# EAGLE board PCB (EAGLE 9.7.0)
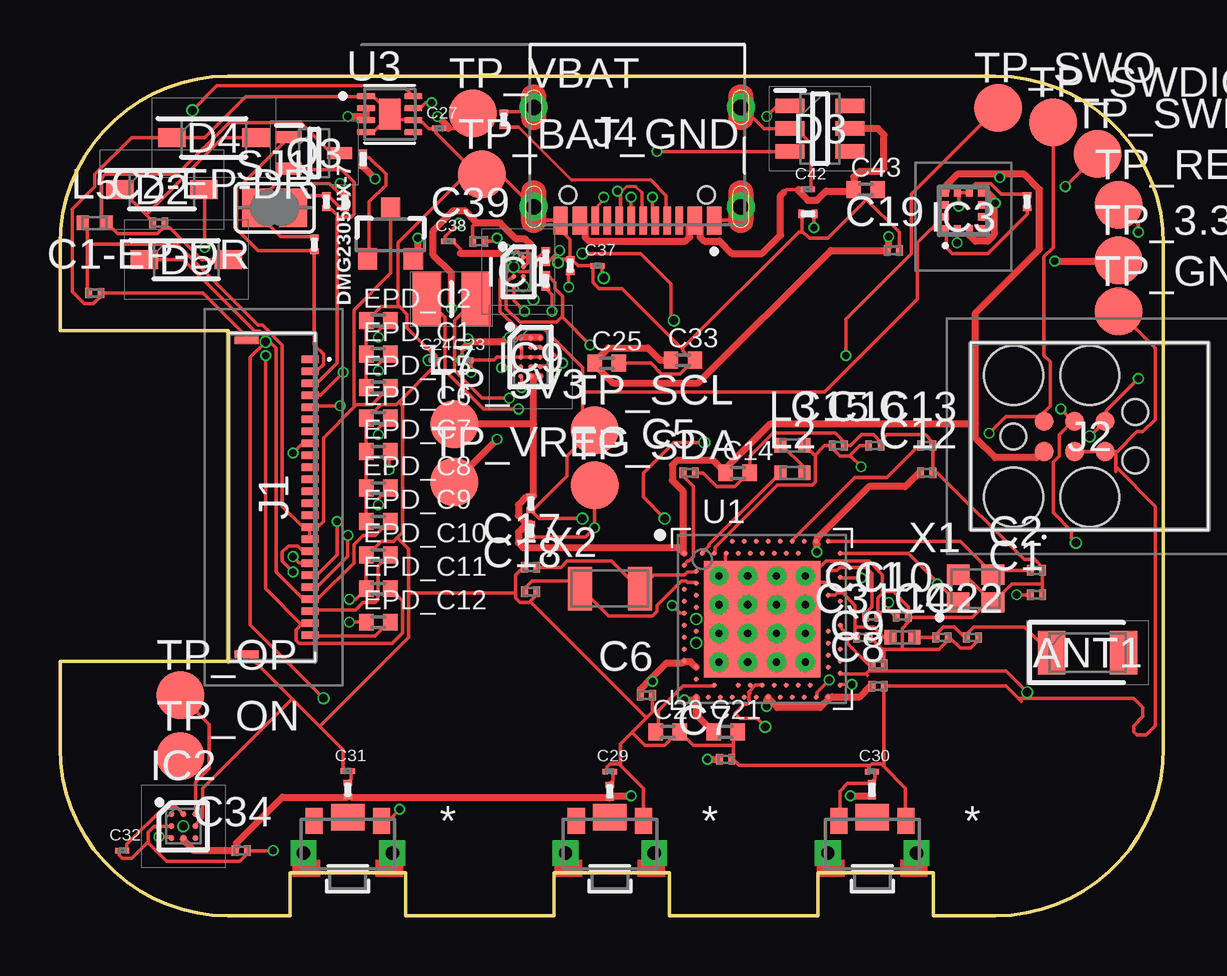
[diagram p0: board, top side]
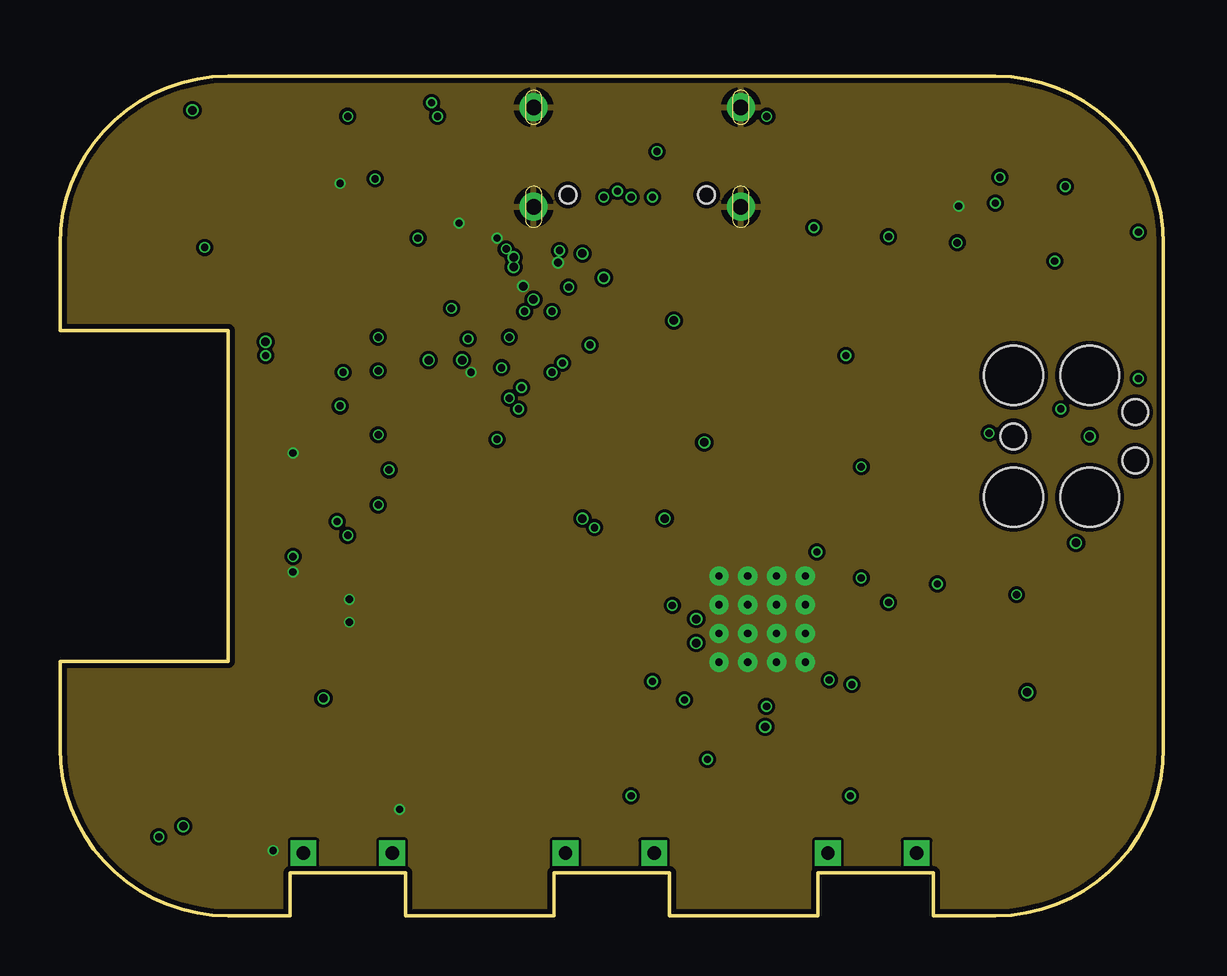
[diagram p1: board, inner layer Route2]
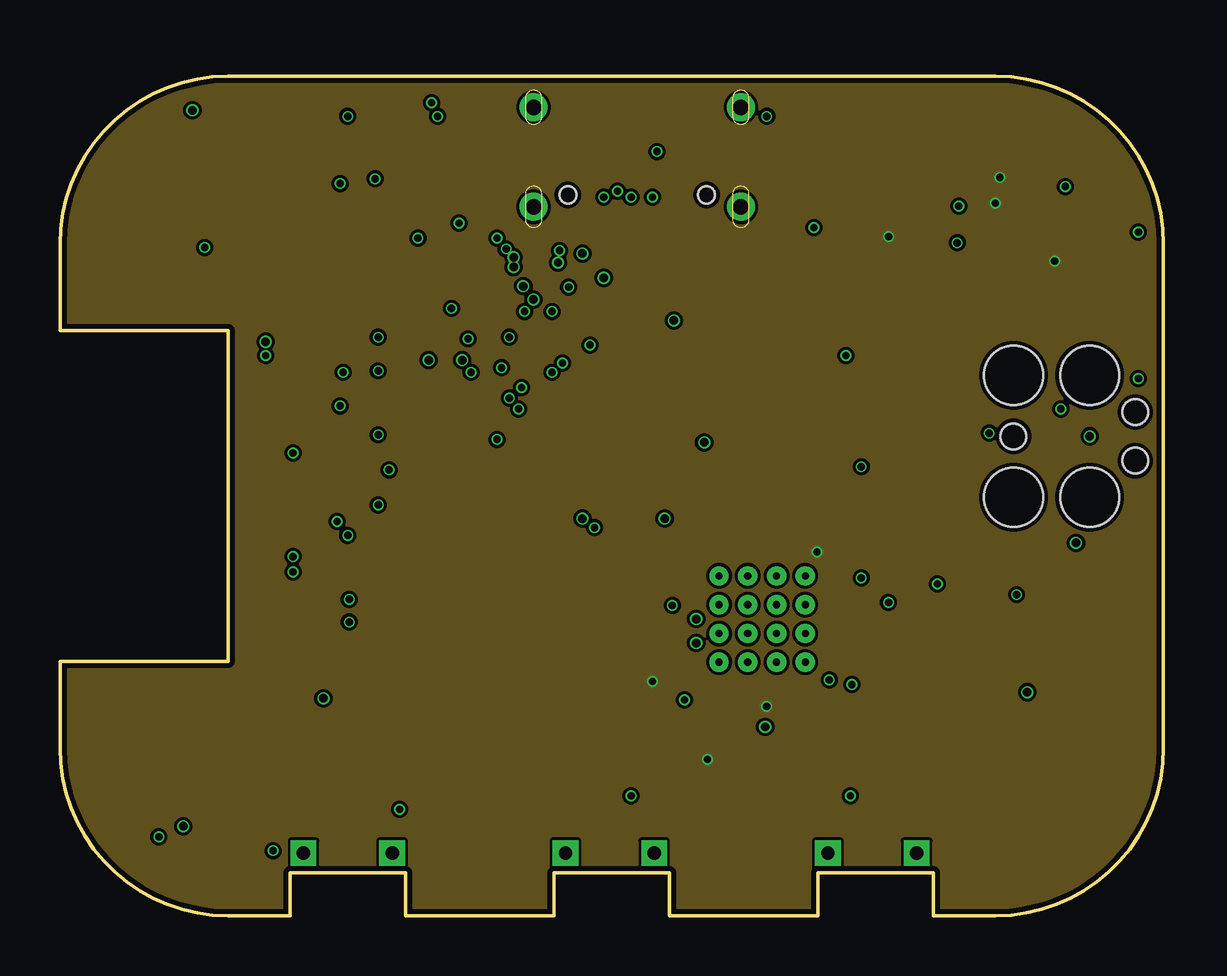
[diagram p2: board, inner layer Route15]
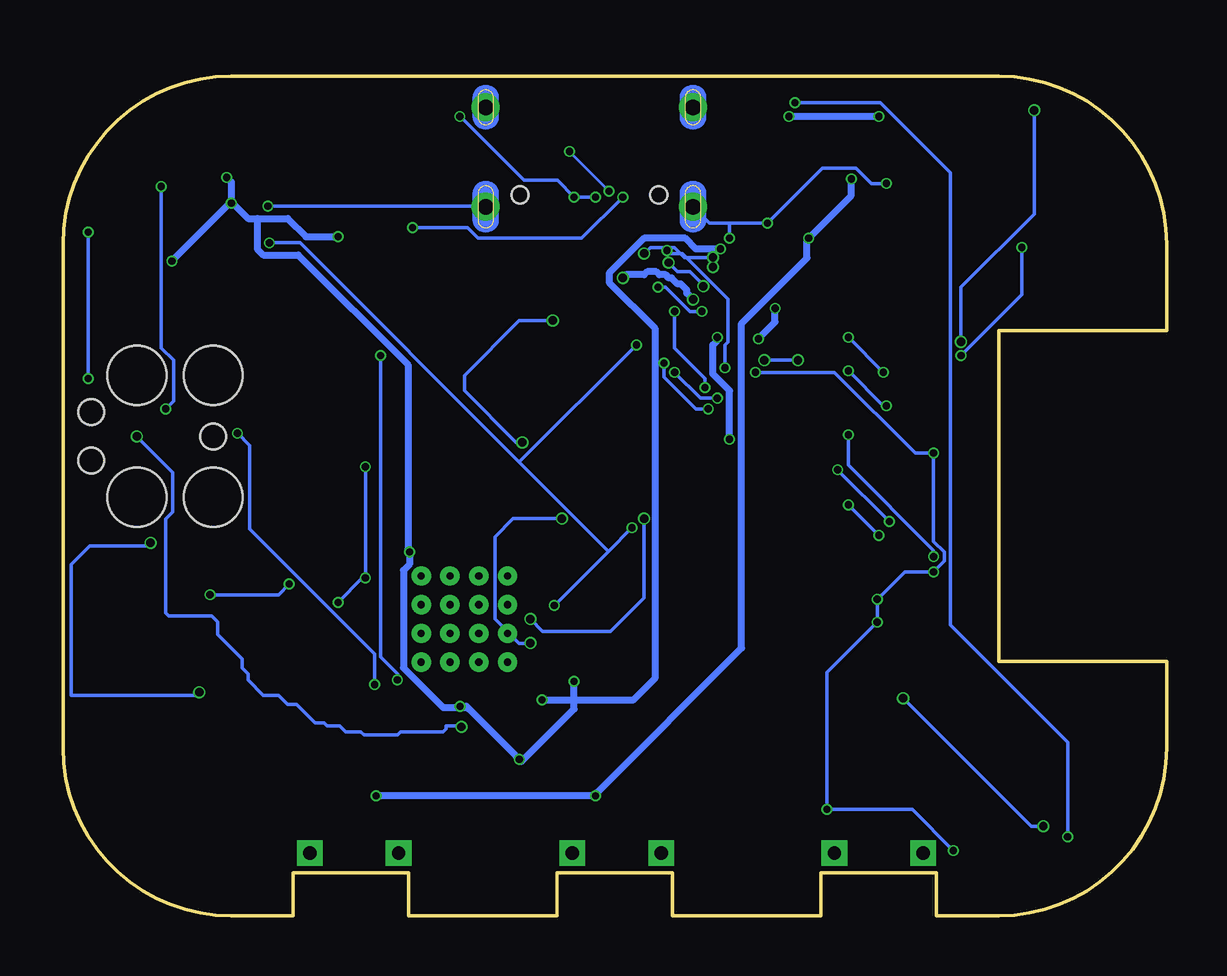
[diagram p3: board, bottom side, seen from below]

Size 46 x 35 mm. Coordinates in mm from the lower left corner, seen from the top.
Outline: 39,0 36.4,0 36.4,1.8 31.6,1.8 31.6,0 25.4,0 25.4,1.8 20.6,1.8 20.6,0 14.4,0 14.4,1.8 9.6,1.8 9.6,0 7,0 arc-90 0,7 0,10.6 7,10.6 7,24.4 0,24.4 0,28 arc-90 7,35 39,35 arc-90 46,28 46,7 arc-90 39,0
Copper layers (1+2*15+16): Top 0.035mm / dielectric 1.6mm / Route2 0.035mm / dielectric 0.15mm / Route15 0.035mm / dielectric 0.2mm / Bottom 0.035mm
Design rules "jlcpcb-2layers.dru *": minimum track width 5mil, minimum drill 0.3mm, track to track 5mil, track to pad 5mil, pad to pad 5mil, via to via 5mil, smd to smd 5mil, copper to edge 0.2mm, drill to drill 6mil, minimum pad ring 10mil, minimum via ring 3mil, stop-mask expansion 4mil, vias tented up to drill 0mil, thermal gap 10mil
Net classes: 1 traseeputere: width 0.3 mm

## Footprints (pad centres in the part's own frame; a part is rotated, then mirrored left to right if it is on the bottom)
2450AT18B100E_ANTC3216X140N = smd 1.15 x 1.8: 1 -1.5,0; 2 1.5,0
NORDIC_NRF_3_RESC0201_L = smd 0.28 x 0.43: 1 -0.255,0; 2 0.255,0
PERFECT_0402_0402 = smd 0.6 x 0.7: 1 -0.5,0; 2 0.5,0
GRM011R60J152KE01L_2_CAPC0201X13N = smd 0.22 x 0.23: 1 -0.185,0; 2 0.185,0
ESP32_C6_LIBRARY_5_SOD3716X135N = smd 1.15 x 0.8: 1 -1.75,0; 2 1.75,0
ESP32_C6_LIBRARY_3_SOT95P280X145-6N = smd 1.2 x 0.6: 1 -1.25,0.95; 2 -1.25,0; 3 -1.25,-0.95; 4 1.25,-0.95; 5 1.25,0; 6 1.25,0.95
ESP32_C6_LIBRARY_4_ESP32_C6_LIBRARY_4_ESP32_C6_LIBRARY_4_ESP32_C6_LIBRARY_4_ESP32_WROVER_SPARKFUN-DISCRETESEMI_SOT23-3 = smd 0.8 x 0.9: 1 -0.95,-1; 2 0.95,-1; 3 0,1.1
BQ25180YBGR_BGA8C40P2X4_100X155X50 = smd 0.2 x 0.2: A1 -0.2,0.6; A2 0.2,0.6; B1 -0.2,0.2; B2 0.2,0.2; C1 -0.2,-0.2; C2 0.2,-0.2; D1 -0.2,-0.6; D2 0.2,-0.6
DRV2605YZFR_BGA9C50P3X3_144X144X62 = smd 0.25 x 0.25: A1 -0.5,0.5; A2 0,0.5; A3 0.5,0.5; B1 -0.5,0; B2 0,0; B3 0.5,0; C1 -0.5,-0.5; C2 0,-0.5; C3 0.5,-0.5
BMA423_BMA423 = smd 0.3 x 0.35: 1 -0.75,-0.775; 2 -0.25,-0.775; 3 0.25,-0.775; 4 0.75,-0.775; 7 0.75,0.775; 8 0.25,0.775; 9 -0.25,0.775; 10 -0.75,0.775 | smd 0.35 x 0.3: 5 0.775,-0.25; 6 0.775,0.25; 11 -0.775,0.25; 12 -0.775,-0.25
RT6160AWSC_BGA15C40P3X5_140X230X60 = smd 0.216 x 0.216: A1 -0.4,0.8; A2 0,0.8; A3 0.4,0.8; B1 -0.4,0.4; B2 0,0.4; B3 0.4,0.4; C1 -0.4,0; C2 0,0; C3 0.4,0; D1 -0.4,-0.4; D2 0,-0.4; D3 0.4,-0.4; E1 -0.4,-0.8; E2 0,-0.8; E3 0.4,-0.8
503480-2400_5034802400 = smd 0.3 x 0.7: 1 -5.75,1.525; 2 -5.25,1.525; 3 -4.75,1.525; 4 -4.25,1.525; 5 -3.75,1.525; 6 -3.25,1.525; 7 -2.75,1.525; 8 -2.25,1.525; 9 -1.75,1.525; 10 -1.25,1.525; 11 -0.75,1.525; 12 -0.25,1.525; 13 0.25,1.525; 14 0.75,1.525; 15 1.25,1.525; 16 1.75,1.525; 17 2.25,1.525; 18 2.75,1.525; 19 3.25,1.525; 20 3.75,1.525; 21 4.25,1.525; 22 4.75,1.525; 23 5.25,1.525; 24 5.75,1.525 | smd 0.3 x 1: MP1 -6.54,-1.125; MP2 6.54,-1.125
TC2030-IDC_TC2030IDC = smd 0.783 x 0.783: 1 -0.953,-0.635; 2 -0.953,0.635; 3 0.317,-0.635; 4 0.317,0.635; 5 1.588,-0.635; 6 1.588,0.635 | hole 2.451: -2.223,-2.54; -2.223,2.54; 0.952,-2.54; 0.952,2.54 | hole 1.067: -2.223,0; 2.857,-1.016; 2.857,1.016
KH-TYPE-C-16P_KINGHELM_KH-TYPE-C-16P = smd 0.6 x 1.15: A1_B12 -3.2,4.725; A4_B9 -2.4,4.725; A9_B4 2.4,4.725; A12_B1 3.2,4.725 | smd 0.3 x 1.15: A5 -1.25,4.725; A6 -0.25,4.725; A7 0.25,4.725; A8 1.25,4.725; B5 1.75,4.725; B6 0.75,4.725; B7 -0.75,4.725; B8 -1.75,4.725 | drill 0.65 pad 1.05: SH1 -4.32,0; SH2 4.32,0; SH3 -4.32,4.15; SH4 4.32,4.15 | hole 0.7: -2.89,3.65; 2.89,3.65
NORDIC_NRF_2_RESC0402_L = smd 0.5 x 0.6: 1 -0.5,0; 2 0.5,0
MLP2016SR47MT0S1_INDC2016X100N = smd 1.2 x 2.2: 1 -1.028,0; 2 1.028,0
ESP32_C6_LIBRARY_6_SOT65P210X110-3N = smd 1.05 x 0.5: 1 -1.05,0.65; 2 -1.05,-0.65; 3 1.05,0
ERA-1AEB3401C_0201 = smd 0.35 x 0.25: 1 0,0.275; 2 0,-0.275
CPF0201D7K68C1_0201 = smd 0.35 x 0.25: 1 0,0.275; 2 0,-0.275
ESP32_C6_LIBRARY_7_JUMPER_SJ = smd 1.168 x 1.6: 1 -0.762,0; 2 0.762,0
2025-10-22_07-23-44_LIBRARY_SW_EVP-AKE31A_PAN = smd 0.711 x 1.092: 1 -1.4,-0.972; 2 1.4,-0.972 | drill 0.559 pad 0.914 square: 3 -1.848,0.381; 4 1.848,0.381 | smd 1.397 x 1.092: 5 0,-1.124
HECTOR_WATCH_1_TP20R = smd 2 x 2: TP 0,0
NORDIC_NRF_4_AQFN50P700X700X85_HS-74N = smd 4.85 x 4.85: P$74 0,0 | drill 0.3 pad 0.6: P$75 -1.8,1.8; P$76 -0.6,1.8; P$77 0.6,1.8; P$78 1.8,1.8; P$79 -1.8,0.6; P$80 -0.6,0.6; P$81 0.6,0.6; P$82 1.8,0.6; P$83 -1.8,-0.6; P$84 -0.6,-0.6; P$85 0.6,-0.6; P$86 1.8,-0.6; P$87 -1.8,-1.8; P$88 -0.6,-1.8; P$89 0.6,-1.8; P$90 1.8,-1.8 | smd 0.2 x 0.2: P$A8 -1.25,3.25; P$A10 -0.75,3.25; P$A12 -0.25,3.25; P$A14 0.25,3.25; P$A16 0.75,3.25; P$A18 1.25,3.25; P$A20 1.75,3.25; P$A22 2.25,3.25; P$A23 2.75,3.25; P$AA24 3.25,-2.25; P$AB2 -2.75,-2.5; P$AC5 -2,-2.75; P$AC9 -1,-2.75; P$AC11 -0.5,-2.75; P$AC13 0,-2.75; P$AC15 0.5,-2.75; P$AC17 1,-2.75; P$AC19 1.5,-2.75; P$AC21 2,-2.75; P$AC24 3.25,-2.75; P$AD2 -2.75,-3.25; P$AD4 -2.25,-3.25; P$AD6 -1.75,-3.25; P$AD8 -1.25,-3.25; P$AD10 -0.75,-3.25; P$AD12 -0.25,-3.25; P$AD14 0.25,-3.25; P$AD16 0.75,-3.25; P$AD18 1.25,-3.25; P$AD20 1.75,-3.25; P$AD22 2.25,-3.25; P$AD23 2.75,-3.25; P$B1 -3.25,2.75; P$B3 -2.5,2.75; P$B5 -2,2.75; P$B7 -1.5,2.75; P$B9 -1,2.75; P$B11 -0.5,2.75; P$B13 0,2.75; P$B15 0.5,2.75; P$B17 1,2.75; P$B19 1.5,2.75; P$B24 3.25,2.75; P$C1 -3.25,2.25; P$D2 -2.75,2; P$D23 2.75,2; P$E24 3.25,1.75; P$F2 -2.75,1.5; P$F23 2.75,1.5; P$G1 -3.25,1.25; P$H2 -2.75,1; P$H23 2.75,1; P$J1 -3.25,0.75; P$J24 3.25,0.75; P$K2 -2.75,0.5; P$L1 -3.25,0.25; P$L24 3.25,0.25; P$M2 -2.75,0; P$N1 -3.25,-0.25; P$N24 3.25,-0.25; P$P2 -2.75,-0.5; P$P23 2.75,-0.5; P$R1 -3.25,-0.75; P$R24 3.25,-0.75; P$T2 -2.75,-1; P$T23 2.75,-1; P$U1 -3.25,-1.25; P$U24 3.25,-1.25; P$V23 2.75,-1.5; P$W1 -3.25,-1.75; P$W24 3.25,-1.75; P$Y2 -2.75,-2; P$Y23 2.75,-2
ESP32_C6_LIBRARY_SON50P200X200X80-9N = smd 0.76 x 0.27: 1 -0.985,0.75; 2 -0.985,0.25; 3 -0.985,-0.25; 4 -0.985,-0.75; 5 0.985,-0.75; 6 0.985,-0.25; 7 0.985,0.25; 8 0.985,0.75 | smd 0.9 x 1.3: 9 0,0
NORDIC_NRF_BT-XTAL_2016_N = smd 0.95 x 0.85: 1 -0.725,-0.575; 2 0.725,-0.575; 3 0.725,0.575; 4 -0.725,0.575
NORDIC_NRF_1_XTAL_3215_N = smd 1 x 1.8: 1 -1.25,0; 2 1.25,0

## Placement (x,y rotation side)
ANT1  2450AT18B100E  [2450AT18B100E_ANTC3216X140N]  42.83,10.97 0 top
C1  12pF  [NORDIC_NRF_3_RESC0201_L]  40.7,13.39 0 top
C1-EP-DR  10uF  [NORDIC_NRF_3_RESC0201_L]  1.46,25.96 0 top
C2  12pF  [NORDIC_NRF_3_RESC0201_L]  40.7,14.4 0 top
C2-EP-DR  4.7uF/25V  [NORDIC_NRF_3_RESC0201_L]  4.12,28.88 0 top
C3  1pF  [NORDIC_NRF_3_RESC0201_L]  33.46,11.61 0 top
C4  1pF  [NORDIC_NRF_3_RESC0201_L]  36.76,11.61 0 top
C5  100nF  [NORDIC_NRF_3_RESC0201_L]  26.22,18.47 0 top
C6  4.7µF  [NORDIC_NRF_3_RESC0201_L]  24.44,9.2 0 top
C7  100nF  [NORDIC_NRF_3_RESC0201_L]  27.75,6.53 0 top
C8  100nF  [NORDIC_NRF_3_RESC0201_L]  34.1,9.58 0 top
C9  820pF  [NORDIC_NRF_3_RESC0201_L]  34.1,10.47 0 top
C10  N.C.  [NORDIC_NRF_3_RESC0201_L]  35.11,12.5 0 top
C11  100pF  [NORDIC_NRF_3_RESC0201_L]  33.84,12.5 0 top
C12  100nF  [NORDIC_NRF_3_RESC0201_L]  36.13,18.47 0 top
C13  N.C.  [NORDIC_NRF_3_RESC0201_L]  36.13,19.61 0 top
C14  4.7µF  [PERFECT_0402_0402]  28.25,18.47 0 top
C15  1.0µF  [NORDIC_NRF_3_RESC0201_L]  32.45,19.61 0 top
C16  47nF  [NORDIC_NRF_3_RESC0201_L]  33.97,19.61 0 top
C17  12pF  [NORDIC_NRF_3_RESC0201_L]  19.62,14.53 0 top
C18  12pF  [NORDIC_NRF_3_RESC0201_L]  19.62,13.51 0 top
C19  100nF  [NORDIC_NRF_3_RESC0201_L]  34.73,27.74 0 top
C20  4.7µF  [PERFECT_0402_0402]  25.33,7.67 0 top
C21  4.7µF  [PERFECT_0402_0402]  27.75,7.67 0 top
C22  N.C.  [NORDIC_NRF_3_RESC0201_L]  38.03,11.61 0 top
C23  0.1uF  [GRM011R60J152KE01L_2_CAPC0201X13N]  16.95,23.16 0 top
C24  10uF  [GRM011R60J152KE01L_2_CAPC0201X13N]  15.55,23.16 0 top
C25  22uF  [PERFECT_0402_0402]  22.79,23.04 0 top
C27  0.1uF  [GRM011R60J152KE01L_2_CAPC0201X13N]  15.81,32.82 0 top
C29  1uF  [GRM011R60J152KE01L_2_CAPC0201X13N]  22.92,6.02 0 top
C30  1uF  [GRM011R60J152KE01L_2_CAPC0201X13N]  33.84,6.02 0 top
C31  1uF  [GRM011R60J152KE01L_2_CAPC0201X13N]  12,6.03 0 top
C32  1uF  [GRM011R60J152KE01L_2_CAPC0201X13N]  2.6,2.72 0 top
C33  22uF  [PERFECT_0402_0402]  25.97,23.16 0 top
C34  0.1uF  [NORDIC_NRF_3_RESC0201_L]  7.55,2.72 0 top
C37  1uF  [GRM011R60J152KE01L_2_CAPC0201X13N]  22.41,27.1 0 top
C38  1uF  [GRM011R60J152KE01L_2_CAPC0201X13N]  16.19,28.12 0 top
C39  10uF  [NORDIC_NRF_3_RESC0201_L]  17.46,28.12 0 top
C42  0.1uF  [GRM011R60J152KE01L_2_CAPC0201X13N]  31.18,30.28 0 top
C43  4.7uF  [PERFECT_0402_0402]  33.59,30.28 0 top
D2  ESP32_C6_LIBRARY_5_MBR0530  [ESP32_C6_LIBRARY_5_SOD3716X135N]  4.25,30.28 0 top
D3  USBLC6-2SC6Y  [ESP32_C6_LIBRARY_3_SOT95P280X145-6N]  31.68,32.82 0 top
D4  ESP32_C6_LIBRARY_5_MBR0530  [ESP32_C6_LIBRARY_5_SOD3716X135N]  6.41,32.44 0 top
D5  ESP32_C6_LIBRARY_5_MBR0530  [ESP32_C6_LIBRARY_5_SOD3716X135N]  5.27,27.36 0 top
DMG2305UX-7  20V/4.2A/52mΩ/1.4W  [ESP32_C6_LIBRARY_4_ESP32_C6_LIBRARY_4_ESP32_C6_LIBRARY_4_ESP32_C6_LIBRARY_4_ESP32_WROVER_SPARKFUN-DISCRETESEMI_SOT23-3]  13.78,28.38 0 top
EPD_C1  1uF/50V  [PERFECT_0402_0402]  13.27,23.42 0 top
EPD_C2  1uF/50V  [PERFECT_0402_0402]  13.27,24.82 0 top
EPD_C5  0.1uF/50V  [PERFECT_0402_0402]  13.27,22.02 0 top
EPD_C6  1uF/50V  [PERFECT_0402_0402]  13.27,20.75 0 top
EPD_C7  1uF/50V  [PERFECT_0402_0402]  13.27,19.36 0 top
EPD_C8  1uF/50V  [PERFECT_0402_0402]  13.27,17.83 0 top
EPD_C9  1uF/50V  [PERFECT_0402_0402]  13.27,16.43 0 top
EPD_C10  1uF/50V  [PERFECT_0402_0402]  13.27,15.04 0 top
EPD_C11  1uF/50V  [PERFECT_0402_0402]  13.27,13.64 0 top
EPD_C12  1uF/50V  [PERFECT_0402_0402]  13.27,12.24 0 top
IC1  BQ25180YBGR  [BQ25180YBGR_BGA8C40P2X4_100X155X50]  19.11,26.85 0 top
IC2  DRV2605YZFR  [DRV2605YZFR_BGA9C50P3X3_144X144X62]  5.14,3.73 0 top
IC3  BMA421  [BMA423_BMA423]  37.65,29.39 0 top
IC9  RT6160AWSC  [RT6160AWSC_BGA15C40P3X5_140X230X60]  19.62,23.29 0 top
J1  503480-2400  [503480-2400_5034802400]  8.9,17.45 270 top
J2  TC2030-IDC  [TC2030-IDC_TC2030IDC]  41.97,19.99 0 top
J4  KH-TYPE-C-16P  [KH-TYPE-C-16P_KINGHELM_KH-TYPE-C-16P]  24.06,33.71 180 top
L1  3.9nH  [NORDIC_NRF_2_RESC0402_L]  35.11,11.61 0 top
L2  10µH  [NORDIC_NRF_2_RESC0402_L]  30.54,18.47 0 top
L3  15nH  [NORDIC_NRF_2_RESC0402_L]  30.54,19.61 0 top
L5  68uH  [NORDIC_NRF_2_RESC0402_L]  1.46,28.88 0 top
L7  FTC252012SR47MBCA  [MLP2016SR47MT0S1_INDC2016X100N]  16.32,25.71 0 top
Q3  SI1308EDL-T1-GE3  [ESP32_C6_LIBRARY_6_SOT65P210X110-3N]  10.6,31.8 0 top
R1_EP_DR  0.47  [ERA-1AEB3401C_0201]  11.11,29.77 0 top
R1_USB  5K1  [CPF0201D7K68C1_0201]  18.51,33.2 0 top
R2  0  [CPF0201D7K68C1_0201]  20.25,26.47 0 top
R2_EP_DR  10K  [ERA-1AEB3401C_0201]  10.6,27.99 0 top
R2_USB  5K1  [ERA-1AEB3401C_0201]  31.18,29.26 270 top
R3  0  [ERA-1AEB3401C_0201]  40.32,29.77 0 top
R4  0  [CPF0201D7K68C1_0201]  20.25,27.48 0 top
R5  10k  [CPF0201D7K68C1_0201]  33.84,5.26 0 top
R7  10k  [CPF0201D7K68C1_0201]  22.92,5.19 0 top
R8  10k  [CPF0201D7K68C1_0201]  12,5.26 0 top
R9  10K  [ERA-1AEB3401C_0201]  21.27,27.1 0 top
R17  3K3  [CPF0201D7K68C1_0201]  19.62,17.2 0 top
R18  3K3  [CPF0201D7K68C1_0201]  19.62,16.05 0 top
R_PWR_EPD  10K  [CPF0201D7K68C1_0201]  12.63,31.55 0 top
R_TYPE_SEL  2.2  [ERA-1AEB3401C_0201]  11.87,29.77 0 top
SJ1  [ESP32_C6_LIBRARY_7_JUMPER_SJ]  8.95,29.52 0 top
SW_DN  2025-10-22_07-23-44_LIBRARY_EVP-AKE31ASW_EVP-AKE31A_PAN  [2025-10-22_07-23-44_LIBRARY_SW_EVP-AKE31A_PAN]  22.92,2.99 180 top
SW_ENT  2025-10-22_07-23-44_LIBRARY_EVP-AKE31ASW_EVP-AKE31A_PAN  [2025-10-22_07-23-44_LIBRARY_SW_EVP-AKE31A_PAN]  12,2.99 180 top
SW_UP  2025-10-22_07-23-44_LIBRARY_EVP-AKE31ASW_EVP-AKE31A_PAN  [2025-10-22_07-23-44_LIBRARY_SW_EVP-AKE31A_PAN]  33.86,2.99 180 top
TP_3.3V  HECTOR_WATCH_1_TPTP20R  [HECTOR_WATCH_1_TP20R]  44.13,27.32 0 top
TP_3V3  HECTOR_WATCH_1_TPTP20R  [HECTOR_WATCH_1_TP20R]  16.44,20.5 0 top
TP_BAT_GND  HECTOR_WATCH_1_TPTP20R  [HECTOR_WATCH_1_TP20R]  17.59,30.91 0 top
TP_GND  HECTOR_WATCH_1_TPTP20R  [HECTOR_WATCH_1_TP20R]  44.13,25.2 0 top
TP_ON  HECTOR_WATCH_1_TPTP20R  [HECTOR_WATCH_1_TP20R]  5.01,6.66 0 top
TP_OP  HECTOR_WATCH_1_TPTP20R  [HECTOR_WATCH_1_TP20R]  5.01,9.2 0 top
TP_RESET  HECTOR_WATCH_1_TPTP20R  [HECTOR_WATCH_1_TP20R]  44.13,29.64 0 top
TP_SCL  HECTOR_WATCH_1_TPTP20R  [HECTOR_WATCH_1_TP20R]  22.29,20.24 0 top
TP_SDA  HECTOR_WATCH_1_TPTP20R  [HECTOR_WATCH_1_TP20R]  22.29,17.96 0 top
TP_SWDCLK  HECTOR_WATCH_1_TPTP20R  [HECTOR_WATCH_1_TP20R]  43.25,31.77 0 top
TP_SWDIO  HECTOR_WATCH_1_TPTP20R  [HECTOR_WATCH_1_TP20R]  41.41,33.08 0 top
TP_SWO  HECTOR_WATCH_1_TPTP20R  [HECTOR_WATCH_1_TP20R]  39.1,33.68 0 top
TP_VBAT  HECTOR_WATCH_1_TPTP20R  [HECTOR_WATCH_1_TP20R]  17.2,33.45 0 top
TP_VREG  HECTOR_WATCH_1_TPTP20R  [HECTOR_WATCH_1_TP20R]  16.44,18.09 0 top
U1  NRF52840_QF  [NORDIC_NRF_4_AQFN50P700X700X85_HS-74N]  29.27,12.37 0 top
U3  MAX17048G+T10  [ESP32_C6_LIBRARY_SON50P200X200X80-9N]  13.74,33.42 0 top
X1  32MHz  [NORDIC_NRF_BT-XTAL_2016_N]  38.16,13.64 0 top
X2  32.768kHz  [NORDIC_NRF_1_XTAL_3215_N]  22.92,13.64 0 top

## Library data of the parts
ANT1 = InkTime_v5 (1); ARROW_PART_NUMBER: 2450AT18B100E; ARROW_PRICE-STOCK: https://www.arrow.com/en/products/2450at18b100e/johanson-dielectrics?utm_currency=USD&region=nac; DESCRIPTION: Antennas 2.45GHz ANTENNA; HEIGHT: 1.4mm; MANUFACTURER_NAME: JOHANSON TECHNOLOGY; MANUFACTURER_PART_NUMBER: 2450AT18B100E; MOUSER_PART_NUMBER: 609-2450AT18B100E; MOUSER_PRICE-STOCK: https://www.mouser.co.uk/ProductDetail/Johanson-Technology/2450AT18B100E?qs=yCnrNFeXz%252Bh5MFsFIXGZGA%3D%3D
C1 C1-EP-DR C2 C2-EP-DR C3-C13 C15-C19 C22 C34 C39 L1-L3 L5 R1_EP_DR R1_USB R2 R2_EP_DR R2_USB R3-R5 R7-R9 R17 R18 R_PWR_EPD R_TYPE_SEL SJ1 TP_3.3V TP_3V3 TP_BAT_GND TP_GND TP_ON TP_OP TP_RESET TP_SCL TP_SDA TP_SWDCLK TP_SWDIO TP_SWO TP_VBAT TP_VREG U1 X1 X2 = InkTime_v5 (1)
C14 C20 C21 C25 C33 C43 EPD_C1 EPD_C2 EPD_C5-EPD_C12 = InkTime_v5
C23 C24 C27 C29-C32 C37 C38 C42 = InkTime_v5 (1); AVAILABILITY: In Stock; CHECK_PRICES: https://www.snapeda.com/parts/GRM011R60J152KE01L/Murata/view-part/?ref=eda; DESCRIPTION: SMD Capacitor X5R(EIA) with Capacitance: 1500pF Tol. 10%. Rated Voltage: 6.3Vdc; MF: Murata; MP: GRM011R60J152KE01L; PACKAGE: 0201 Murata; PRICE: None; SNAPEDA_LINK: https://www.snapeda.com/parts/GRM011R60J152KE01L/Murata/view-part/?ref=snap
D2 D4 D5 = InkTime_v5 (1); AVAILABILITY: In Stock; CHECK_PRICES: https://www.snapeda.com/parts/MBR0530/Onsemi/view-part/?ref=eda; DESCRIPTION: Diode Schottky 30 V 500mA Surface Mount SOD-123; MF: ON Semiconductor; MP: MBR0530; PACKAGE: SOD-123-2 ON Semiconductor; PRICE: None; PURCHASE-URL: https://www.snapeda.com/api/url_track_click_mouser/?unipart_id=179458&manufacturer=ON Semiconductor&part_name=MBR0530&search_term=None; SNAPEDA_LINK: https://www.snapeda.com/parts/MBR0530/Onsemi/view-part/?ref=snap
D3 = InkTime_v5 (1); AVAILABILITY: In Stock; CHECK_PRICES: https://www.snapeda.com/parts/USBLC6-2SC6Y/STMicroelectronics/view-part/?ref=eda; DESCRIPTION: 17V Clamp 5A (8/20µs) Ipp Tvs Diode Surface Mount SOT-23-6; MF: STMicroelectronics; MP: USBLC6-2SC6Y; PACKAGE: SOT-23-6 STMicroelectronics; PRICE: None; SNAPEDA_LINK: https://www.snapeda.com/parts/USBLC6-2SC6Y/STMicroelectronics/view-part/?ref=snap
DMG2305UX-7 = InkTime_v5 (1); PROD_ID: TRAN-14388
IC1 = InkTime_v5 (1); ARROW_PART_NUMBER: BQ25180YBGR; ARROW_PRICE-STOCK: https://www.arrow.com/en/products/bq25180ybgr/texas-instruments?utm_currency=USD&region=nac; DESCRIPTION: Charger IC Lithium Ion/Polymer, Lithium Iron Phosphate 8-DSBGA (1.6x1.1); HEIGHT: 0.5mm; MANUFACTURER_NAME: Texas Instruments; MANUFACTURER_PART_NUMBER: BQ25180YBGR; MOUSER_PART_NUMBER: 595-BQ25180YBGR; MOUSER_PRICE-STOCK: https://www.mouser.co.uk/ProductDetail/Texas-Instruments/BQ25180YBGR?qs=doiCPypUmgEWjAK%252BJAX6Tw%3D%3D
IC2 = InkTime_v5 (1); ARROW_PART_NUMBER: DRV2605YZFR; ARROW_PRICE-STOCK: https://www.arrow.com/en/products/drv2605yzfr/texas-instruments?region=nac; DESCRIPTION: Haptic Driver for ERM/LRA with Built-In Library and Smart Loop Architecture; HEIGHT: 0.625mm; MANUFACTURER_NAME: Texas Instruments; MANUFACTURER_PART_NUMBER: DRV2605YZFR
IC3 = InkTime_v5 (1); ARROW_PART_NUMBER: BMA423; ARROW_PRICE-STOCK: https://www.arrow.com/en/products/bma423/bosch; DESCRIPTION: Accelerometers Triaxial low-g 12bit Acceleration Sensor; HEIGHT: 1mm; MANUFACTURER_NAME: BOSCH; MANUFACTURER_PART_NUMBER: BMA423; MOUSER_PART_NUMBER: 262-BMA423; MOUSER_PRICE-STOCK: https://www.mouser.co.uk/ProductDetail/Bosch-Sensortec/BMA423?qs=HXFqYaX1Q2xC%252BSgeGoX3mg%3D%3D
IC9 = InkTime_v5 (1); DESCRIPTION: Buck-Boost Regulator Positive Output Step-Up/Step-Down I2C DC-DC Controller IC 15-WL-CSP (BSC) (1.4x2.3); HEIGHT: 0.6mm; MANUFACTURER_NAME: RICHTEK; MANUFACTURER_PART_NUMBER: RT6160AWSC; MOUSER_PART_NUMBER: 835-RT6160AWSC; MOUSER_PRICE-STOCK: https://www.mouser.co.uk/ProductDetail/Richtek/RT6160AWSC?qs=amGC7iS6iy%2FLd9PSoixZXQ%3D%3D
J1 = InkTime_v5 (1); DESCRIPTION: FFC & FPC Connectors 0.5mm FPC RA SMT Dual Contact 24Ckt; HEIGHT: 1.87mm; MANUFACTURER_NAME: Molex; MANUFACTURER_PART_NUMBER: 503480-2400; MOUSER_PART_NUMBER: 538-503480-2400; MOUSER_PRICE-STOCK: https://www.mouser.co.uk/ProductDetail/Molex/503480-2400?qs=OAhjpuo3Vu7efIoxFh9AOw%3D%3D
J2 = InkTime_v5 (1); DESCRIPTION: CABLE ADAPTER 6 POS; HEIGHT: 19mm; MANUFACTURER_NAME: Tag Connect; MANUFACTURER_PART_NUMBER: TC2030-IDC
J4 = InkTime_v5 (1); AVAILABILITY: Not in stock; CHECK_PRICES: https://www.snapeda.com/parts/KH-TYPE-C-16P/Kinghelm/view-part/?ref=eda; MF: kinghelm; MP: KH-TYPE-C-16P; PACKAGE: None; PRICE: None; SNAPEDA_LINK: https://www.snapeda.com/parts/KH-TYPE-C-16P/Kinghelm/view-part/?ref=snap
L7 = InkTime_v5 (1); DESCRIPTION: SMD / SMT Inductors (Coils), L=0.47?H, L x W x T :; HEIGHT: 1mm; JLCPCB: https://jlcpcb.com/partdetail/6763488-FTC252012SR47MBCA/C5832368; MANUFACTURER_NAME: TDK; MANUFACTURER_PART_NUMBER: FTC252012SR47MBCA
Q3 = InkTime_v5 (1); AVAILABILITY: In Stock; CHECK_PRICES: https://www.snapeda.com/parts/SI1308EDL-T1-GE3/Vishay+Siliconix/view-part/?ref=eda; DESCRIPTION: Si1308EDL-T1-GE3 N-channel MOSFET Transistor, 1.5 A, 30 V, 3-Pin SC-70 | Siliconix / Vishay SI1308EDL-T1-GE3; MF: Vishay Siliconix; MP: SI1308EDL-T1-GE3; PACKAGE: SOT-323 Vishay Semiconductor; PRICE: None; PURCHASE-URL: https://www.snapeda.com/api/url_track_click_mouser/?unipart_id=274603&manufacturer=Vishay Siliconix&part_name=SI1308EDL-T1-GE3&search_term=None; SNAPEDA_LINK: https://www.snapeda.com/parts/SI1308EDL-T1-GE3/Vishay+Siliconix/view-part/?ref=snap
SW_DN SW_ENT SW_UP = InkTime_v5 (1); COPYRIGHT: Copyright (C) 2025 Ultra Librarian. All rights reserved.; DIGI-KEY_PART_NUMBER_1: P123437TR-ND; DIGI-KEY_PART_NUMBER_2: P123437CT-ND; DIGI-KEY_PART_NUMBER_3: P123437DKR-ND; MANUFACTURER_NAME: Panasonic; MANUFACTURER_PART_NUMBER: EVP-AKE31A
U3 = InkTime_v5 (1); AVAILABILITY: In Stock; CHECK_PRICES: https://www.snapeda.com/parts/MAX17048G+T10/Analog+Devices/view-part/?ref=eda; DESCRIPTION: 3µA 1-Cell/2-Cell Fuel Gauge with ModelGauge; MF: Analog Devices; MP: MAX17048G+T10; PACKAGE: TDFN-8 Maxim; PRICE: None; PURCHASE-URL: https://www.snapeda.com/api/url_track_click_mouser/?unipart_id=329239&manufacturer=Analog Devices&part_name=MAX17048G+T10&search_term=None; SNAPEDA_LINK: https://www.snapeda.com/parts/MAX17048G+T10/Analog+Devices/view-part/?ref=snap

## Nets
3V3/1.7D [traseeputere]: C34.1 DMG2305UX-7.2 IC2.C2 R5.2 R7.2 R8.2 R_PWR_EPD.2
3V3/2.4A [traseeputere]: C6.1 C7.1 C8.1 C12.1 C14.1 C19.1 C25.1 C33.1 IC3.3 IC3.7 IC3.10 IC9.E2 IC9.E3 J2.1 R17.1 R18.1 TP_3.3V.TP TP_3V3.TP U1.P$A22 U1.P$AD14 U1.P$AD23 U1.P$B1 U1.P$W1 U1.P$Y2
ALERT/1.6C: U3.5
ALERT/2.5C: U1.P$J24
D+/1.5D: D3.4
D+/2.7D: U1.P$AD6
D-/1.5D: D3.6
D-/2.7D: U1.P$AD4
DN: D3.1 J4.A7 J4.B7
DP: D3.3 J4.A6 J4.B6
EPD_3V3: C1-EP-DR.1 DMG2305UX-7.3 EPD_C5.2 J1.15 J1.16 L5.1
EPD_BUSY/1.5D: J1.9
EPD_BUSY/2.2D: U1.P$AD12
EPD_CS/1.4C: J1.12
EPD_CS/2.2D: U1.P$K2
EPD_DC/1.5D: J1.11
EPD_DC/2.2D: U1.P$AD10
EPD_RST/1.5D: J1.10
EPD_RST/2.2D: U1.P$AC11
GDR: J1.2 Q3.1 R2_EP_DR.2
GND: C1-EP-DR.2 C1.2 C2.2 C3.2 C4.2 C5.2 C6.2 C7.2 C8.2 C9.2 C10.2 C11.2 C12.2 C13.2 C14.2 C15.2 C16.2 C17.1 C18.2 C19.2 C20.2 C21.2 C22.2 C23.2 C24.2 C25.2 C27.1 C29.1 C30.1 C31.1 C32.1 C33.2 C34.2 C37.1 C38.1 C39.2 C42.2 C43.2 D3.2 D4.1 EPD_C1.1 EPD_C2.1 EPD_C5.1 EPD_C6.1 EPD_C7.1 EPD_C8.1 EPD_C9.1 EPD_C10.1 EPD_C11.1 EPD_C12.1 IC1.D2 IC2.B1 IC2.B3 IC3.8 IC3.9 IC9.B1 IC9.C1 IC9.C2 IC9.C3 J1.8 J1.17 J1.MP1 J1.MP2 J2.3 J2.5 J4.A1_B12 J4.A12_B1 J4.SH1 J4.SH2 J4.SH3 J4.SH4 R1_USB.1 R2_EP_DR.1 R2_USB.2 R3.1 R9.1 R_TYPE_SEL.1 SJ1.1 SW_DN.1 SW_ENT.1 SW_UP.1 TP_BAT_GND.TP TP_GND.TP U1.P$74 U1.P$75 U1.P$76 U1.P$77 U1.P$78 U1.P$79 U1.P$80 U1.P$81 U1.P$82 U1.P$83 U1.P$84 U1.P$85 U1.P$86 U1.P$87 U1.P$88 U1.P$89 U1.P$90 U1.P$B7 U1.P$F23 U3.1 U3.4 U3.6 U3.9 X1.2 X1.4
HAPTIC_EN/1.4C: IC2.A1
HAPTIC_EN/2.6A: U1.P$U1
IMU_INT1: U1.P$N1
IMU_INT2: U1.P$P2
JJ: C10.1 C15.1 C16.1 L3.2 U1.P$B5 U1.P$E24
LX1: IC9.B2 IC9.B3 L7.1
LX2: IC9.D2 IC9.D3 L7.2
MOSI/1.5B: J1.14
MOSI/2.2D: U1.P$B13
MU_INT1: IC3.5
MU_INT2: IC3.6
N$1: IC1.D1 R9.2
N$2: IC9.D1 R4.2
N$3: IC9.E1 R2.2
N$4: IC3.1 R3.2
N$5: C20.1 U1.P$AC5
N$6: C18.1 U1.P$F2 X2.1
N$7: C17.2 U1.P$D2 X2.2
N$8: C5.1 U1.P$C1
N$9: C9.1 U1.P$N24
N$10: L2.1 U1.P$B3
N$11: L2.2 L3.1
N$12: C3.1 L1.1 U1.P$H23
N$13: ANT1.1 C4.1 C22.1 L1.2
N$14: C11.1 U1.P$D23
N$15: C2.1 U1.P$A23 X1.3
N$16: C1.1 U1.P$B24 X1.1
N$17: C2-EP-DR.2 D5.2 L5.2 Q3.3
N$18: C2-EP-DR.1 D2.1 D4.2
N$20: R1_EP_DR.1 R_TYPE_SEL.2 SJ1.2
N$22: C13.1 U1.P$A18
N$23: C32.2 IC2.A2
N$24: EPD_C2.2 J1.4
N$25: EPD_C1.2 J1.5
N$28: EPD_C6.2 J1.18
N$29: EPD_C7.2 J1.19
N$30: EPD_C8.2 J1.20
N$31: J4.A5 R1_USB.2
N$32: EPD_C10.2 J1.22
N$33: C31.2 R8.1
N$34: EPD_C12.2 J1.24
N$35: J4.B5 R2_USB.1
N$36: C29.2 R7.1
OUT: IC2.C3
OUT+: IC2.A3 TP_OP.TP
OUT-: TP_ON.TP
P0.04: U1.P$J1
P0.09: U1.P$L24
P0.13/1.5D: C30.2 R5.1 SW_UP.2
P0.13/2.6C: U1.P$AD8
P0.14/1.5D: SW_ENT.2
P0.14/2.7C: U1.P$AC9
P0.19: U1.P$AC15
P0.20: U1.P$AD16
P0.21: U1.P$AC17
P0.22: U1.P$AD18
P0.23: U1.P$AC19
P0.24: U1.P$AD20
P0.25: U1.P$AC21
P0.26: U1.P$G1
P0.27: U1.P$H2
P0.28: U1.P$B11
P0.29: U1.P$A10
P0.30: U1.P$B9
P0.31: U1.P$A8
P1.01/1.6C: DMG2305UX-7.1 R_PWR_EPD.1
P1.01/2.4B: U1.P$Y23
P1.02/1.6C: SW_DN.2
P1.02/2.8C: U1.P$W24
P1.03: U1.P$V23
P1.04: U1.P$U24
P1.05: U1.P$T23
P1.06: U1.P$R24
P1.07: U1.P$P23
P1.09: U1.P$R1
P1.10: U1.P$A20
P1.11: U1.P$B19
P1.12: U1.P$B17
P1.13: U1.P$A16
P1.14: U1.P$B15
P1.15: U1.P$A14
PMIC_INT: IC1.A1 U1.P$T2
PREVGH: D5.1 EPD_C9.2 J1.21
PREVGL: D2.2 EPD_C11.2 J1.23
RESE: J1.3 Q3.2 R1_EP_DR.2
RESET: J2.6 TP_RESET.TP U1.P$AC13
SCK/1.5B: J1.13
SCK/2.2D: U1.P$A12
SCL/1.4C: IC2.C1 U3.7
SCL/2.4C: IC1.B1 IC3.12 R4.1 R17.2 TP_SCL.TP U1.P$M2
SDA/1.4C: IC2.B2 U3.8
SDA/2.4C: IC1.C1 IC3.2 R2.1 R18.2 TP_SDA.TP U1.P$L1
SWDCLK: J2.4 TP_SWDCLK.TP U1.P$AA24
SWDIO: J2.2 TP_SWDIO.TP U1.P$AC24
SWO: TP_SWO.TP U1.P$AD22
VBAT/1.2A [traseeputere]: C27.2 TP_VBAT.TP U3.2 U3.3
VBAT/2.5C [traseeputere]: C37.2 IC1.C2
VBUS/1.5D [traseeputere]: C42.1 C43.1 D3.5 J4.A4_B9 J4.A9_B4
VBUS/2.6D [traseeputere]: C21.1 C38.2 IC1.A2 U1.P$AD2
VREG [traseeputere]: C23.1 C24.1 C39.1 IC1.B2 IC9.A1 IC9.A2 IC9.A3 TP_VREG.TP

## Tracks (layer width: path | path; a pad name or v marks a point on that pad's centre or on a via)
3V3/1.7D  (via drill 0.3)
  Top 0.3: v13.14,30.72 12.63,31.23 R_PWR_EPD.2 | v14.92,28.25 14.92,27.61 14.73,27.42 DMG2305UX-7.2 | IC2.C2 5.14,3.16 5.59,2.72 C34.1 7.36,2.85 7.36,3.04 9.27,4.94 12,4.94 R8.2 12.12,4.94 22.92,4.94 R7.2 23.05,5 v23.81,5 | v32.95,5 33.84,5 R5.2
  Bottom 0.3: v13.14,30.72 13.14,30.02 v14.92,28.25 14.98,28.12 14.98,27.42 17.71,24.69 17.71,11.16 23.75,5.13 v23.81,5 v32.95,5
3V3/2.4A  (via drill 0.3)
  Top 0.3: C12.1 35.81,18.47 35.24,17.89 33.71,17.89 31.56,15.73 31.56,15.67 U1.P$A22 31.56,15.48 v31.56,15.16 | 26.03,10.59 26.29,10.59 26.48,10.4 U1.P$Y2 | 26.03,10.59 U1.P$W1 | 24.6,9.86 25.27,10.53 25.9,10.53 26.03,10.59 | 24.6,9.86 24.19,9.45 C6.1 | 29.52,9.07 29.9,8.69 31.68,8.69 32.06,9.07 | 29.52,9.07 U1.P$AD14 | 32.06,9.07 U1.P$AD23 | v26.98,6.53 C7.1 | C8.1 33.78,9.58 33.33,9.13 32.19,9.13 32.06,9.07 | v24.7,9.77 24.6,9.86 | 25.97,15.35 25.97,17.7 25.52,18.15 25.52,18.78 25.71,18.97 27.24,18.97 C14.1 27.75,18.66 29.59,20.5 38.16,20.5 | 25.97,15.35 25.97,15.16 U1.P$B1 | 19.74,22.47 20,22.47 IC9.E3 | 19.74,22.47 19.62,22.47 IC9.E2 | 19.43,16.37 19.62,16.37 R18.1 | 19.43,16.37 19.11,16.69 19.11,17.13 19.43,17.45 19.62,17.45 R17.1 19.74,17.51 19.74,20.5 | 19.74,20.5 19.74,22.47 | 19.74,20.5 TP_3V3.TP | 25.97,15.35 19.3,15.35 19.11,15.55 19.11,15.99 19.36,16.24 19.43,16.37 | C33.1 25.01,23.16 24.51,23.67 22.86,23.67 22.35,23.16 C25.1 22.35,23.04 22.35,22.91 23.05,22.21 26.6,22.21 32.13,27.74 C19.1 34.54,27.86 v34.54,28.31 | 38.92,29.71 38.92,29.9 38.67,30.15 38.41,30.15 IC3.7 | 38.92,29.71 38.92,28.37 38.67,28.12 38.16,28.12 37.91,28.37 37.91,28.56 IC3.3 | 39.18,30.91 40.19,30.91 40.83,30.28 40.83,27.8 38.16,25.13 38.16,20.5 | 39.18,30.91 37.4,30.91 36.95,30.47 36.95,30.21 IC3.10 | 38.16,20.5 38.16,19.93 38.98,19.1 40.7,19.1 40.95,19.36 J2.1 | v38.98,29.71 38.92,29.71 | v39.18,30.79 39.18,30.91 | v41.46,27.29 44.13,27.29 TP_3.3V.TP | 29.52,9.07 29.45,9 v29.45,8.73
  Bottom 0.3: 29.08,8.62 27.33,6.88 v26.98,6.53 26.89,6.43 24.7,8.62 v24.7,9.77 | 29.08,8.62 29.21,8.69 30.16,8.69 31.81,10.34 31.81,14.4 31.56,14.66 v31.56,15.16 31.62,15.29 31.62,22.97 36.19,27.55 37.65,27.55 37.91,27.8 37.91,29.07 | v38.98,29.71 38.98,30.6 v39.18,30.79 | v41.46,27.29 39.11,29.64 v38.98,29.71 | v34.54,28.31 35.87,28.31 36.64,29.07 37.91,29.07 | 37.91,29.07 38.29,29.07 38.86,29.64 v38.98,29.71 | v29.45,8.73 29.19,8.73 29.08,8.62
  pour Route15: -2.48,-5.33 50.25,-5.33 50.21,-5.31 50.2,-5.31 50.2,-5.31 50.19,-5.31 50.19,-5.31 50.19,-5.31 50.19,-5.31 50.18,-5.3 50.18,-5.3 50.18,-5.3 50.18,-5.3 50.18,-5.3 50.17,-5.3 50.01,-5.18 50,-5.18 50,-5.18 50,-5.17 49.99,-5.17 49.99,-5.17 49.98,-5.16 49.84,-5.02 49.83,-5.01 49.83,-5.01 49.83,-5 49.82,-5 49.82,-5 49.82,-4.99 49.7,-4.83 49.7,-4.82 49.7,-4.82 49.7,-4.82 49.7,-4.82 49.7,-4.82 49.69,-4.81 49.69,-4.81 49.69,-4.81 49.69,-4.81 49.69,-4.8 49.69,-4.8 49.69,-4.79 49.6,-4.61 49.6,-4.61 49.59,-4.6 49.59,-4.59 49.59,-4.59 49.59,-4.59 49.59,-4.59 49.54,-4.39 49.53,-4.38 49.53,-4.38 49.53,-4.38 49.53,-4.37 49.53,-4.37 49.53,-4.36 49.52,-4.16 49.51,-4.16 49.51,-4.14 49.51,-4.13 49.51,-4.13 49.51,37.69 -3.67,37.69 -3.67,-4.14 -3.66,-4.35 -3.6,-4.55 -3.51,-4.74 -3.39,-4.91 -3.25,-5.05 -3.08,-5.17 -2.89,-5.26 -2.69,-5.32
DN  (via drill 0.3)
  Top 0.15: v23.81,29.96 23.81,29.01 J4.A7 | v24.7,29.96 24.7,29.07 24.76,29.01 J4.B7 | v29.46,33.32 29.84,33.71 30.41,33.71 D3.1
  Bottom 0.15: v23.81,29.96 v24.7,29.96 25.4,30.66 26.79,30.66 v29.46,33.32
DP  (via drill 0.3)
  Top 0.127: 23.4,30.18 23.62,30.4 24,30.4 24.25,30.15
  Top 0.15: 24.25,30.15 24.25,29.01 J4.A6 | J4.B6 23.37,29.01 23.37,30.15 23.4,30.18 23.37,30.21 v23.24,30.21 | v24.89,31.86 30.41,31.86 D3.3
  Bottom 0.127: v23.24,30.21 v24.89,31.86
EPD_3V3
  Top 0.15: 1.14,27.99 1.14,28.75 1.01,28.88 L5.1 | 1.14,27.99 1.14,25.96 C1-EP-DR.1 | J1.16 10.41,15.73 10.41,16.18 J1.15 | 12.28,21.23 10.98,19.93 10.98,16.43 10.79,16.24 10.47,16.24 J1.15 | 12.28,21.23 12.38,21.32 13.01,21.32 13.71,22.02 EPD_C5.2 | DMG2305UX-7.3 13.78,26.78 12.25,25.26 12.25,21.26 12.28,21.23 | 1.14,27.99 4.89,27.99 8.25,24.62 8.44,24.62 9.27,23.8 9.27,17.07 10.16,16.18 10.35,16.18 J1.15
GDR
  Top 0.15: J1.2 10.47,22.72 10.73,22.72 10.98,22.97 10.98,23.42 10.6,23.8 R2_EP_DR.2 10.6,27.74 8.25,27.74 7.36,28.63 7.36,30.4 7.49,30.53 7.62,30.53 9.52,32.44 Q3.1
GND  (via drill 0.3, 0.35)
  Top 0.15: J1.MP1 7.74,23.99 7.74,24.18 5.97,25.96 C1-EP-DR.2 1.71,25.83 1.39,25.52 1.01,25.52 0.5,26.02 0.5,29.45 1.46,30.4 1.46,30.91 2.98,32.44 D4.1 6.03,32.44 7.74,34.15 12.7,34.15 U3.1 12.76,34.15 13.08,34.15 13.78,33.45 U3.9 | U3.4 12.76,32.69 13.08,32.69 13.78,33.39 U3.9 | U3.9 13.84,33.39 14.03,33.2 14.73,33.2 U3.6 14.79,33.13 15.05,33.13 15.36,32.82 C27.1 15.68,32.82 15.68,32.63 17.4,30.91 TP_BAT_GND.TP | 27.49,14.21 27.75,14.47 27.75,15.1 U1.P$B7 | U1.P$F23 32,13.89 31.37,13.89 31.11,14.15 U1.P$74 27.49,14.21 | C5.2 26.79,18.47 27.37,17.89 28.13,17.89 28.7,18.47 C14.2 28.76,18.47 28.76,19.16 29.71,20.12 32.32,20.12 32.83,19.61 | C13.2 C12.2 36.57,18.47 40.19,14.85 40.64,14.85 40.95,14.53 C2.2 | 32.83,19.61 32.95,19.61 33.4,20.05 33.9,20.05 34.22,19.74 C16.2 34.22,19.8 34.48,20.05 36.07,20.05 36.38,19.74 C13.2 | 32.83,19.61 C15.2 32.76,19.61 | C13.2 | C2.2 40.95,13.83 | 40.95,13.83 C1.2 | 40.95,13.83 39.68,13.83 38.92,13.07 X1.2 | X1.4 37.46,14.21 37.72,14.21 38.86,13.07 X1.2 | 34.32,13.48 34.35,13.51 34.73,13.51 35.37,12.88 C10.2 | 34.32,13.48 34.1,13.26 C11.2 | C22.2 38.29,11.48 37.97,11.16 37.52,11.16 37.08,11.61 C4.2 37.08,11.54 36.64,11.1 35.11,11.1 | 34.32,11.07 33.78,11.61 C3.2 | 34.32,11.07 34.35,11.04 C9.2 | 35.11,11.1 34.35,11.1 34.32,11.07 | 35.37,12.43 35.37,12.24 35.11,11.99 35.11,11.1 | 35.37,12.43 C10.2 | C10.2 35.37,12.43 | 35.37,12.43 38.03,12.43 38.73,13.13 X1.2 | 30.95,28.53 31.24,28.25 32,28.25 33.62,29.86 | 30.95,28.53 30.92,28.56 30.92,29.26 R2_USB.2 | 33.62,29.86 34.03,30.28 C43.2 | 33.62,29.86 34.98,28.5 C19.2 | R2_EP_DR.1 10.6,28.31 9.2,28.31 8.19,29.32 SJ1.1 8.19,29.71 9.01,30.53 11.24,30.53 11.46,30.31
  Top 0.15: 11.46,30.31 11.68,30.09 11.87,30.09 R_TYPE_SEL.1 | C42.2 31.3,30.28 31.3,32.18 30.67,32.82 D3.2 29.33,32.82 28.44,33.71 J4.SH1 | C25.2 24.63,23.04 25.08,22.59 25.84,22.59 26.41,23.16 C33.2 26.35,23.16 25.97,23.55 25.97,23.61 25.94,23.64 | C37.1 21.59,27.1 21.27,27.42 | 21.27,27.42 21.27,28.18 20.89,28.56 20.89,28.94 J4.A12_B1 20.82,29.01 20.25,29.01 19.74,29.52 J4.SH4 19.68,29.58 18.35,30.91 TP_BAT_GND.TP | 21.27,27.42 R9.1 20.91,27.38 v20.76,27.23 | R3.1 40.32,30.09 39.24,30.09 38.79,30.53 38.16,30.53 37.84,30.21 IC3.8 37.84,30.15 37.46,30.15 IC3.9 37.46,30.09 v37.46,29.58 | v16.63,28.88 16.06,28.31 16.06,28.12 C38.1 | R1_USB.1 18.54,33.52 19.49,33.52 19.68,33.71 J4.SH2 | C39.2 18.09,28.12 v18.22,28.25 | J4.A1_B12 27.3,29.01 27.87,29.01 28.38,29.52 J4.SH3 | 25.94,23.64 23.43,26.15 22.48,26.15 22.22,26.4 C37.1 | C37.1 | v11.68,30.53 11.46,30.31 | 25.94,23.64 30.79,28.5 30.92,28.5 30.95,28.53 | 34.32,13.48 34.29,13.51 34.29,14.21 33.71,14.78 31.94,14.78 31.24,14.09 U1.P$78 | C2.2 | 27.49,14.21 U1.P$75 | 9.68,9.04 7.81,10.91 J1.MP2 | 9.68,9.04 10.82,7.89 | 10.82,7.89 11.81,6.91 11.81,6.08 C31.1 | EPD_C1.1 EPD_C5.1 | EPD_C1.1 EPD_C2.1 12.82,24.82 13.4,25.39 14.09,25.39 | EPD_C1.1 | EPD_C8.1 EPD_C9.1 | 15.68,23.16 15.68,22.97 14.12,21.42 | 14.12,21.42 14.03,21.32 13.4,21.32 12.82,20.75 EPD_C6.1 EPD_C7.1 | EPD_C7.1 EPD_C8.1 | EPD_C8.1 | EPD_C7.1 | 14.09,25.39 14.16,25.39 14.48,25.07 14.48,24.5 15.49,23.48 15.55,23.48 15.68,23.36 15.68,23.16 | 15.68,23.16 C24.2 | 3.65,3.07 3.68,3.1 3.68,3.48 3.93,3.73 IC2.B1 | 3.65,3.07 2.98,2.4 2.6,2.4 2.47,2.53 2.47,2.72 C32.1 | 3.65,3.07 4.44,2.27 7.49,2.27 7.81,2.59 C34.2 v8.89,2.72
  Top 0.15: 19.24,23.29 19.24,23.67 IC9.B1 | 19.24,23.29 IC9.C2 IC9.C3 | 19.24,23.29 IC9.C1 18.22,23.29 18.09,23.16 C23.2 | v12.06,12.24 EPD_C12.1 | v12.06,13.2 12.32,13.2 EPD_C11.1 | EPD_C11.1 EPD_C10.1 12.82,15.04 13.4,15.61 13.9,15.61 14.06,15.77 | EPD_C11.1 | v9.71,14.34 9.27,14.78 9.27,15.16 9.52,15.42 9.9,15.42 10.09,15.23 10.41,15.23 J1.17 | v9.71,19.29 10.09,19.67 10.41,19.67 J1.8 | v14.16,4.43 13.71,3.99 13.46,3.99 SW_ENT.1 | v17.14,22.66 C23.2 | C23.2 | 14.12,21.42 14.28,21.26 14.28,15.99 14.06,15.77 | 10.82,7.89 14.54,11.61 14.54,13.45 | 14.54,13.45 14.54,15.29 14.06,15.77 | J2.3 J2.5 44,19.36 | 44,19.36 44.07,19.36 44.89,20.18 45.15,20.18 45.65,20.69 45.65,23.67 TP_GND.TP | 33.75,6.24 33.84,6.34 34.22,6.34 34.32,6.24 | 33.75,6.24 33.71,6.21 33.71,6.02 C30.1 | 34.32,6.24 35.24,5.32 35.24,3.99 SW_UP.1 | 34.32,6.24 34.35,6.27 C8.2 39.43,9.58 39.94,9.07 | 19.59,13.1 19.55,13.07 19.17,13.07 18.98,13.26 18.98,13.45 | 19.59,13.1 19.87,13.39 C18.2 | 18.98,13.45 18.98,14.21 19.3,14.53 C17.1 | 28.06,7.1 28.06,7.54 28.19,7.67 C21.2 | 28.06,7.1 28.06,6.53 | 23.33,6.31 24.32,5.32 24.32,3.99 SW_DN.1 | 23.33,6.31 23.3,6.34 22.92,6.34 22.79,6.21 22.79,6.02 C29.1 | 23.84,7.64 23.37,7.16 23.37,6.34 23.33,6.31 | 23.84,7.64 24.44,8.24 | 24.44,8.24 24.7,8.5 C6.2 | 23.84,7.64 24.38,7.1 25.21,7.1 25.78,7.67 C20.2 25.84,7.67 26.41,7.1 28.06,7.1 | 24.44,8.24 19.59,13.1 | 28.06,6.53 28.32,6.27 33.71,6.27 33.75,6.24 | 28.06,6.53 C7.2 | 44,18.53 44,18.72 | 44,18.72 44,19.36 | 18.98,13.45 14.54,13.45 | 14.09,25.39 14.09,28.05 17.14,31.1 TP_BAT_GND.TP | IC2.B3 5.64,3.79 5.96,4.1 5.96,5.31 9.68,9.04 | 44,18.72 45.65,17.07 45.65,7.93 45.27,7.54 44.89,7.54 44.76,7.67 44.76,7.93 45.15,8.31 45.15,8.69 44.76,9.07 39.94,9.07
  Top 0.15: 39.94,9.07 40.07,8.94
  Bottom 0.15: 18.22,28.88 19.05,28.88 19.68,29.52 J4.SH4 | 18.22,28.88 v16.63,28.88 14.35,31.17 12.95,31.17 12.32,30.53 v11.68,30.53 | 18.22,28.88 v18.22,28.25 | v37.46,29.58 28.44,29.58 J4.SH3 | v17.14,22.66 13.84,22.66 10.47,19.29 v9.71,19.29 9.71,15.61 9.27,15.16 9.27,14.78 v9.71,14.34 10.92,14.34 v12.06,13.2 v12.06,12.24 14.16,10.15 v14.16,4.43 10.6,4.43 v8.89,2.72 | v20.76,27.23 20.38,26.85 19.87,26.85 19.31,26.29 IC1.D2
  other vias: 19.31,26.25
  pour Route2: -3.67,-4.06 50,-4.06 49.79,-3.99 49.79,-3.99 49.79,-3.99 49.78,-3.98 49.77,-3.98 49.76,-3.98 49.76,-3.98 49.76,-3.98 49.76,-3.97 49.46,-3.81 49.46,-3.81 49.46,-3.81 49.45,-3.81 49.45,-3.8 49.44,-3.8 49.44,-3.8 49.44,-3.8 49.43,-3.79 49.43,-3.79 49.43,-3.79 49.16,-3.59 49.15,-3.58 49.15,-3.58 49.14,-3.57 49.14,-3.57 48.89,-3.32 48.89,-3.32 48.88,-3.31 48.88,-3.31 48.87,-3.3 48.67,-3.03 48.67,-3.03 48.67,-3.03 48.66,-3.02 48.66,-3.02 48.66,-3.02 48.66,-3.01 48.65,-3.01 48.65,-3 48.65,-3 48.65,-3 48.49,-2.7 48.48,-2.7 48.48,-2.69 48.48,-2.68 48.47,-2.67 48.35,-2.35 48.35,-2.35 48.35,-2.34 48.35,-2.33 48.35,-2.32 48.27,-1.99 48.27,-1.98 48.27,-1.97 48.27,-1.96 48.27,-1.96 48.24,-1.62 48.24,-1.62 48.24,-1.6 48.24,-1.59 48.24,-1.59 48.24,37.69 -3.67,37.69
JJ  (via drill 0.3)
  Top 0.15: v33.4,14.09 32.57,14.09 U1.P$E24 | v34.54,13.07 34.54,12.75 34.79,12.5 C10.1 | 31.46,19.2 L3.2 | 31.46,19.2 31.49,19.16 31.49,18.09 31.37,17.96 29.9,17.96 27.3,15.35 27.3,15.16 U1.P$B5 | 32.06,19.61 31.87,19.61 31.46,19.2 | 32.06,19.61 C15.1 32.13,19.61 | C16.1 33.33,19.61 32.92,19.2 | 32.92,19.2 32.89,19.16 32.51,19.16 32.06,19.61 | 32.92,19.2 v33.4,18.72
  Bottom 0.15: v34.54,13.07 33.52,14.09 v33.4,14.09 v33.4,18.72
LX1  (via drill 0.3)
  Top 0.15: IC9.B2 19.62,23.74 20,23.74 IC9.B3 20.06,23.67 20.32,23.67 v20.95,23.04 | v19.11,21.13 17.65,21.13 16.06,22.72 16.06,24.94 L7.1
  Bottom 0.15: v20.95,23.04 20.95,22.47 19.62,21.13 v19.11,21.13
LX2  (via drill 0.3)
  Top 0.15: IC9.D2 19.62,22.91 20,22.91 IC9.D3 20.06,22.91 20.25,22.91 v20.51,22.66 | v18.73,21.58 17.59,21.58 16.44,22.72 16.44,24.82 L7.2
  Bottom 0.15: v20.51,22.66 19.43,21.58 v18.73,21.58
N$1  (via drill 0.3)
  Top 0.15: v19.36,25.2 18.92,25.64 18.92,26.21 IC1.D1 | v21.2,26.21 21.2,26.72 21.27,26.78 R9.2
  Bottom 0.15: v19.36,25.2 19.87,25.2 20.89,26.21 v21.2,26.21
N$2  (via drill 0.3)
  Top 0.15: v18.41,22.85 19.17,22.85 IC9.D1 | v20.82,27.74 20.25,27.16 R4.2
  Bottom 0.15: v18.41,22.85 18.41,23.8 18.29,23.93 18.29,25.71 20.19,27.61 20.7,27.61 v20.82,27.74
N$3  (via drill 0.3)
  Top 0.15: v19.24,22.02 19.24,22.47 IC9.E1 | v20.51,25.2 20.51,25.9 20.25,26.15 R2.2
  Bottom 0.15: v19.24,22.02 19.24,22.4 20.51,23.67 v20.51,25.2
N$4
  Top 0.15: R3.2 40.32,29.26 38.67,27.61 37.21,27.61 36.95,27.86 36.95,28.56 IC3.1
N$5
  Top 0.15: U1.P$AC5 27.24,9.58 25.97,9.58 24.95,8.56 24.95,7.73 24.89,7.67 C20.1
N$6
  Top 0.15: U1.P$F2 26.48,13.89 26.16,13.89 26.09,13.96 25.9,13.96 24.89,12.94 24.89,12.69 24.7,12.5 22.86,12.5 21.71,13.64 X2.1 21.65,13.64 21.33,13.96 19.68,13.96 19.36,13.64 C18.1
N$7
  Top 0.15: U1.P$D2 26.48,14.34 26.16,14.34 26.03,14.21 24.76,14.21 24.19,13.64 X2.2 24.13,13.64 22.98,14.78 21.14,14.78 20.89,14.53 C17.2
N$8
  Top 0.15: U1.P$C1 26.03,14.66 26.16,14.78 26.22,14.78 26.41,14.97 26.41,17.89 25.97,18.34 C5.1
N$9
  Top 0.15: C9.1 33.71,10.47 32.83,11.35 32.83,11.73 32.57,11.99 32.57,12.12 U1.P$N24
N$10
  Top 0.15: U1.P$B3 26.79,15.16 27.05,15.42 27.05,15.48 L2.1
N$11
  Top 0.15: L2.2 30.98,18.47 30.98,18.72 30.09,19.61 L3.1
N$12
  Top 0.15: 33.14,12.05 33.14,11.61 C3.1 | 33.14,12.05 33.14,12.94 32.64,13.45 32.38,13.45 32.32,13.39 32.06,13.39 U1.P$H23 | L1.1 34.35,11.61 33.9,12.05 33.14,12.05
N$13
  Top 0.15: L1.2 36.38,11.61 | 36.38,11.61 C4.1 36.45,11.61 | 36.38,11.61 36.83,12.05 37.27,12.05 37.72,11.61 C22.1 37.72,11.67 38.1,12.05 40.19,12.05 41.27,10.97 ANT1.1
N$14
  Top 0.15: U1.P$D23 32.06,14.4 32.38,14.4 32.51,14.53 33.59,14.53 33.84,14.28 33.84,12.88 33.59,12.62 C11.1
N$15
  Top 0.15: U1.P$A23 32.06,15.61 37.52,15.61 38.86,14.28 X1.3 38.92,14.28 39.05,14.4 C2.1
N$16  (via drill 0.3)
  Top 0.15: 36.6,13.86 37.4,13.07 X1.1 | 36.6,13.86 35.37,15.1 32.57,15.1 U1.P$B24 | v39.87,13.39 C1.1 | v36.57,13.83 36.6,13.86
  Bottom 0.15: v39.87,13.39 37.02,13.39 v36.57,13.83
N$17
  Top 0.15: Q3.3 11.3,31.8 10.03,33.07 7.04,33.07 4.89,30.91 1.89,30.91 1.73,30.76 1.73,29.05 1.9,28.88 L5.2 2.41,28.44 4.06,28.44 4.38,28.75 C2-EP-DR.2 4.38,28.69 4.57,28.69 5.9,27.36 D5.2
N$18
  Top 0.15: 3.58,29.23 2.54,30.28 D2.1 | 3.58,29.23 3.81,29.01 3.81,28.88 C2-EP-DR.1 | D4.2 6.79,32.44 3.58,29.23
N$20
  Top 0.15: R_TYPE_SEL.2 11.87,29.52 11.68,29.52 11.11,30.09 R1_EP_DR.1 11.11,30.02 10.22,30.02 SJ1.2
N$22
  Top 0.15: U1.P$A18 30.54,15.67 33.14,18.28 34.48,18.28 35.81,19.61 C13.1
N$23
  Top 0.15: C32.2 2.79,2.97 4.38,4.56 4.82,4.56 5.14,4.24 IC2.A2
N$24  (via drill 0.3)
  Top 0.15: v11.81,22.66 10.85,21.71 10.47,21.71 J1.4 | v13.27,24.12 13.27,24.37 13.71,24.82 EPD_C2.2
  Bottom 0.15: v13.27,24.12 v11.81,22.66
N$25  (via drill 0.3)
  Top 0.15: v11.68,21.26 10.47,21.26 J1.5 | v13.27,22.72 13.27,22.97 13.71,23.42 EPD_C1.2
  Bottom 0.15: v11.68,21.26 11.81,21.26 v13.27,22.72
N$28  (via drill 0.3)
  Top 0.15: v9.71,14.97 9.97,14.72 10.41,14.72 J1.18 | v13.27,20.05 13.27,20.31 13.71,20.75 EPD_C6.2
  Bottom 0.15: v9.71,14.97 9.71,15.23 13.27,18.78 v13.27,20.05
N$29  (via drill 0.3)
  Top 0.15: v11.55,16.43 11.55,15.04 10.73,14.21 10.47,14.21 J1.19 | v13.71,18.59 13.71,19.36 EPD_C7.2
  Bottom 0.15: v13.71,18.59 v11.55,16.43
N$30  (via drill 0.3)
  Top 0.15: v12,15.86 12,14.97 10.73,13.7 10.47,13.7 J1.20 | v13.27,17.13 13.27,17.39 13.71,17.83 EPD_C8.2
  Bottom 0.15: v13.27,17.13 v12,15.86
N$31
  Top 0.127: 19.11,32.88 21.33,30.66 24.63,30.66
  Top 0.15: 19.11,32.88 18.54,32.88 R1_USB.2 | 24.63,30.66 25.27,30.02 25.27,29.01 J4.A5
N$32
  Top 0.15: J1.22 10.47,12.75 12.32,12.75 12.63,13.07 13.14,13.07 13.27,13.2 13.27,14.59 13.71,15.04 EPD_C10.2
N$33
  Top 0.15: C31.2 12.12,6.02 12.12,5.7 12,5.58 R8.1
N$34
  Top 0.15: J1.24 10.47,11.67 13.14,11.67 13.71,12.24 EPD_C12.2
N$35  (via drill 0.3)
  Top 0.127: v22.67,29.96 22.67,29.83 22.35,29.52
  Top 0.15: v31.43,28.69 31.43,29.26 R2_USB.1 | 22.35,29.52 22.35,29.01 J4.B5
  Bottom 0.15: v31.43,28.69 29.14,28.69 28.7,28.25 24.38,28.25 v22.67,29.96
N$36
  Top 0.15: C29.2 23.05,6.02 23.05,5.64 22.92,5.51 R7.1
OUT+
  Top 0.15: TP_OP.TP 6.22,7.99 6.22,6.15 5.65,5.58 5.65,4.24 IC2.A3
P0.13/1.5D
  Top 0.15: C30.2 33.97,6.02 33.97,5.7 33.84,5.58 R5.1 33.84,5.51 32.83,5.51 32.51,5.2 32.51,3.99 SW_UP.2
P1.01/1.6C
  Top 0.15: R_PWR_EPD.1 12.63,31.8 12.82,31.61 12.89,31.61 13.59,30.91 13.59,30.47 12.89,29.77 12.89,27.42 DMG2305UX-7.1
PMIC_INT  (via drill 0.35)
  Top 0.15: v21.78,27.61 24.19,27.61 25.46,26.34 25.46,24.82 v25.59,24.82 | v26.86,19.74 25.59,19.74 24.32,18.47 24.32,17.45 v25.21,16.56
  Bottom 0.15: IC1.A1 20.09,27.45 20.51,27.86 21.52,27.86 v21.78,27.61 | v25.59,24.82 26.98,24.82 29.27,22.53 29.27,21.9 27.11,19.74 v26.86,19.74 | v25.21,16.56 27.24,16.56 28,15.8 28,12.37 26.98,11.35 26.48,11.35 26.49,11.37 U1.P$T2
  other vias: 18.91,27.45 26.52,11.37
PREVGH
  Top 0.15: EPD_C9.2 13.71,16.43 13.14,15.86 12.63,15.86 12.25,15.48 12.25,14.72 10.79,13.26 10.47,13.26 J1.21 10.41,13.26 10.09,13.26 9.01,14.34 9.01,23.67 8.31,24.37 8.12,24.37 5.14,27.36 D5.1
PREVGL  (via drill 0.3)
  Top 0.15: 10.06,12.15 9.84,11.93 9.84,11.48 9.97,11.35 13.84,11.35 14.28,11.8 14.28,13.13 EPD_C11.2 | 10.06,12.15 10.09,12.18 10.41,12.18 J1.23 | v6.03,27.86 6.03,30.28 D2.2 | v8.57,23.36 8.57,13.64 10.06,12.15
  Bottom 0.15: v6.03,27.86 6.03,25.9 v8.57,23.36
RESE
  Top 0.15: 11.59,29.17 11.62,29.13 12.12,29.13 12.25,29.26 12.25,30.6 11.74,31.1 9.59,31.1 Q3.2 | 11.59,29.17 11.3,29.45 11.11,29.45 R1_EP_DR.2 | J1.3 10.47,22.21 10.73,22.21 11.55,23.04 11.55,29.13 11.59,29.17
RESET  (via drill 0.3, 0.35)
  Top 0.15: v44.95,22.4 43.62,21.07 43.62,20.62 J2.6 42.99,20.05 42.99,19.99 42.98,19.99 v42.92,19.99 | v44.95,28.5 44.95,28.82 TP_RESET.TP | v29.4,7.88 29.05,8.22 28.34,8.22 28.13,8.43 28.51,8.82 28.65,8.82 28.77,8.94 28.72,9 28.72,9.25 28.77,9.3 28.75,9.32 28.69,9.32 28.99,9.62 U1.P$AC13
  Bottom 0.15: v44.95,28.5 v44.95,22.4 | v42.92,19.99 41.42,18.49 41.42,16.83 41.72,16.53 41.72,12.62 41.59,12.5 39.81,12.5 39.56,12.24 39.56,11.73 38.54,10.72 38.54,10.34 38.29,10.08 38.29,9.83 37.65,9.2 37.02,9.2 36.64,8.81 36.26,8.81 35.49,8.05 35.11,8.05 34.98,7.93 34.48,7.93 34.22,7.67 33.59,7.67 33.46,7.54 32.06,7.54 31.94,7.67 30.16,7.67 30.03,7.8 30.03,7.93 29.45,7.93 v29.4,7.88
SCL/1.4C  (via drill 0.3)
  Top 0.15: v4.12,3.29 4.63,3.29 IC2.C1 | v15.49,33.9 15.24,33.9 15.05,33.71 14.79,33.71 U3.7
  Bottom 0.15: v4.12,3.29 4.12,7.23 9.01,12.12 9.01,30.98 11.93,33.9 v15.49,33.9
SCL/2.4C  (via drill 0.35)
  Top 0.15: 21.78,21.83 21.78,20.75 TP_SCL.TP 22.22,20.24 21.14,19.16 21.14,18.34 19.74,16.94 19.62,16.94 R17.2 19.98,16.56 v21.78,16.56 | 21.78,21.83 21.78,22.85 20.13,24.5 19.05,24.5 18.35,25.2 18.35,26.53 18.86,27.04 IC1.B1 19.11,26.85 19.62,26.85 19.87,27.1 19.87,27.38 R4.1 | 21.78,21.83 31.87,21.83 35.75,25.71 35.75,28.05 36.83,29.13 IC3.12
  Bottom 0.15: U1.P$M2 26.01,11.86 23.17,11.86 21.78,13.26 v21.78,16.56
  other vias: 26.52,12.37 18.91,27.05
SDA/1.4C  (via drill 0.35)
  Top 0.15: U3.8 14.71,34.17 14.28,34.6 6.54,34.6 v5.52,33.58 | v8.57,23.93 7.93,23.29 7.93,12.12 v10.98,9.07
  Bottom 0.15: v5.52,33.58 5.52,29.26 8.57,26.21 v8.57,23.93 | v10.98,9.07 5.65,3.73 IC2.B2
  other vias: 5.14,3.73
SDA/2.4C  (via drill 0.3)
  Top 0.15: 20.92,24.98 20.95,25.01 20.95,25.83 20.63,26.15 20.63,26.4 20.25,26.78 R2.1 | 20.92,24.98 20.7,24.75 19.17,24.75 18.6,25.32 18.6,26.4 18.79,26.59 18.86,26.59 IC1.C1 | v25.52,12.94 25.84,12.62 25.97,12.62 U1.P$L1 | TP_SDA.TP v22.29,16.18 21.9,15.8 19.62,15.8 R18.2 | v37.4,28.05 37.4,28.56 IC3.2 | v22.09,23.8 20.92,24.98
  Bottom 0.15: v22.29,16.18 23.27,15.2 | 23.27,15.2 v25.52,12.94 | v37.4,28.05 36.13,28.05 26.98,18.91 | 23.27,15.2 26.98,18.91 | 26.98,18.91 v22.09,23.8
SWDCLK  (via drill 0.3, 0.35)
  Top 0.15: 33.59,10.08 32.57,10.08 U1.P$AA24 | 33.65,10.02 33.59,10.08 | 42.22,20.62 41.65,20.05 41.65,19.16 41.4,18.91 41.4,16.82 42.16,16.05 42.16,15.73 v42.35,15.55 | v41.91,30.4 43.24,31.74 TP_SWDCLK.TP | 42.22,20.62 v41.72,21.13 | 42.22,20.62 J2.4 | 33.59,10.08 33.71,10.21 39.43,10.21 v40.32,9.32
  Bottom 0.15: v41.91,30.4 41.91,23.67 41.4,23.16 41.4,21.45 v41.72,21.13 | v40.32,9.32 40.45,9.2 45.65,9.2 45.65,14.66 44.89,15.42 42.48,15.42 v42.35,15.55
SWDIO  (via drill 0.3)
  Top 0.15: v33.02,9.64 32.57,9.64 U1.P$AC24 | v38.73,20.12 39.43,20.82 40.76,20.82 40.95,20.62 J2.2 40.83,20.82 41.27,21.26 41.27,23.1 41.02,23.36 41.02,27.48 41.4,27.86 41.4,33.07 TP_SWDIO.TP
  Bottom 0.15: v33.02,9.64 33.02,10.91 38.22,16.12 38.22,19.61 v38.73,20.12
SWO  (via drill 0.3)
  Top 0.15: v32.06,9.83 31.56,9.32 31.56,9.13 U1.P$AD22 | v32.76,23.36 32.76,24.88 35.49,27.61 35.49,30.09 39.05,33.64 TP_SWO.TP
  Bottom 0.15: v32.06,9.83 32.06,10.08 32.76,10.78 v32.76,23.36
VBAT/1.2A  (via drill 0.3)
  Top 0.15: TP_VBAT.TP 16.57,32.82 16.19,32.82 C27.2
  Top 0.3: 12.76,33.32 12.76,33.64 U3.2 | 12.76,33.32 12.76,33.2 U3.3 | v12,33.32 12.76,33.32 | v15.74,33.32 16.19,32.88 16.19,32.82
  Bottom 0.3: v15.74,33.32 v12,33.32
VBAT/2.5C  (via drill 0.35)
  Top 0.15: IC1.C2 19.31,26.52 19.74,26.09 v19.74,25.71 | v22.67,26.59 22.6,26.66 C37.2
  Top 0.3: v19.73,25.7 v19.74,25.71
  Bottom 0.3: v19.73,25.7 20,25.96 20,26.09 20.25,26.34 20.38,26.34 20.63,26.59 20.76,26.59 20.89,26.72 21.14,26.72 21.27,26.85 21.65,26.85 21.78,26.72 22.54,26.72 v22.67,26.59
VBUS/1.5D
  Top 0.15: 30.16,30.15 30.29,30.28 30.79,30.28 C42.1
  Top 0.3: J4.A9_B4 21.89,28.76 21.89,28.29 22.05,28.13 26.08,28.13 26.24,28.29 26.24,28.76 J4.A4_B9 26.69,28.76 26.69,28.29 26.85,28.13 27.48,28.13 28,27.61 29.27,27.61 30.03,28.37 30.03,30.02 30.16,30.15 | D3.5 34.1,32.82 34.35,32.56 34.35,31.17 34.22,31.04 33.33,31.04 33.09,30.79 C43.1 32.95,30.21 31.94,30.21 31.56,29.83 31.18,29.83 30.79,30.21 30.79,30.28
VBUS/2.6D  (via drill 0.3)
  Top 0.15: IC1.A2 19.21,27.55 19.21,27.57 18.92,27.86 18.73,27.86 18.63,27.77 18.48,27.61 | 16.7,27.61 16.7,27.8 C38.2
  Top 0.3: 18.48,27.61 16.7,27.61 | 26.54,9 26.54,8.37 27.24,7.67 C21.1 | 26.54,9 26.54,9.07 U1.P$AD2 | v26.03,9 26.54,9 | v18.6,27.8 18.63,27.77
  Bottom 0.3: v26.03,9 22.22,9 21.33,9.89 21.33,24.5 23.24,26.4 23.24,26.78 21.78,28.25 20.06,28.25 19.62,27.8 v18.6,27.8
VREG  (via drill 0.3, 0.35)
  Top 0.15: IC1.B2 19.41,27.15 19.43,27.15 19.49,27.2 19.49,27.86 19.62,27.99 | 17.33,28.88 17.2,28.75 C39.1 | IC9.A1 18.64,24.09 18.6,24.05 | 16.82,23.67 16.77,23.62 C23.1
  Top 0.3: 17.08,23.93 18.48,23.93 18.6,24.05 v18.73,24.12 | 17.08,23.93 16.82,23.67 | 19.62,27.99 19.39,28.22 19.01,28.22 18.35,28.88 17.33,28.88 17.27,29.01 16.89,29.39 16.38,29.39 15.55,28.56 15.55,27.55 16.32,26.78 v16.32,25.32 | 19.62,24.12 19.24,24.12 IC9.A1 | 19.62,24.12 IC9.A2 | 19.62,24.12 20,24.12 IC9.A3 | TP_VREG.TP v18.22,19.86 | v17.01,24.05 17.08,23.93
  Bottom 0.15: C24.1 C23.1
  Bottom 0.3: v18.73,24.12 18.73,23.99 18.92,23.8 18.92,22.59 18.22,21.9 v18.22,19.86 | v16.32,25.32 16.32,24.75 v17.01,24.05
  other vias: 15.37,23.16 16.77,23.16
(copper drawn outside any net)
  shapes: Route15 area x1, Route2 area x1